# Altium PCB 175-00024_rev3, Backplane, Instrument Crate.PcbDoc (part 4 of 4)
Units mil, origin at the board's own origin, x right, y up, seen from the top; angles counter-clockwise.
Board outline 8400 x 10183.07 mil, 8 copper layers (Top Layer (*.GTL), Mid-Layer 1 (*.G1), +3.3V (*.GP1), +24V (*.GP2), RTN (*.GP3), +12V (*.GP4), Signal GND (*.GP5), Bottom Layer (*.GBL)); 240 components, 169 nets, 1580 pads, 490 vias.
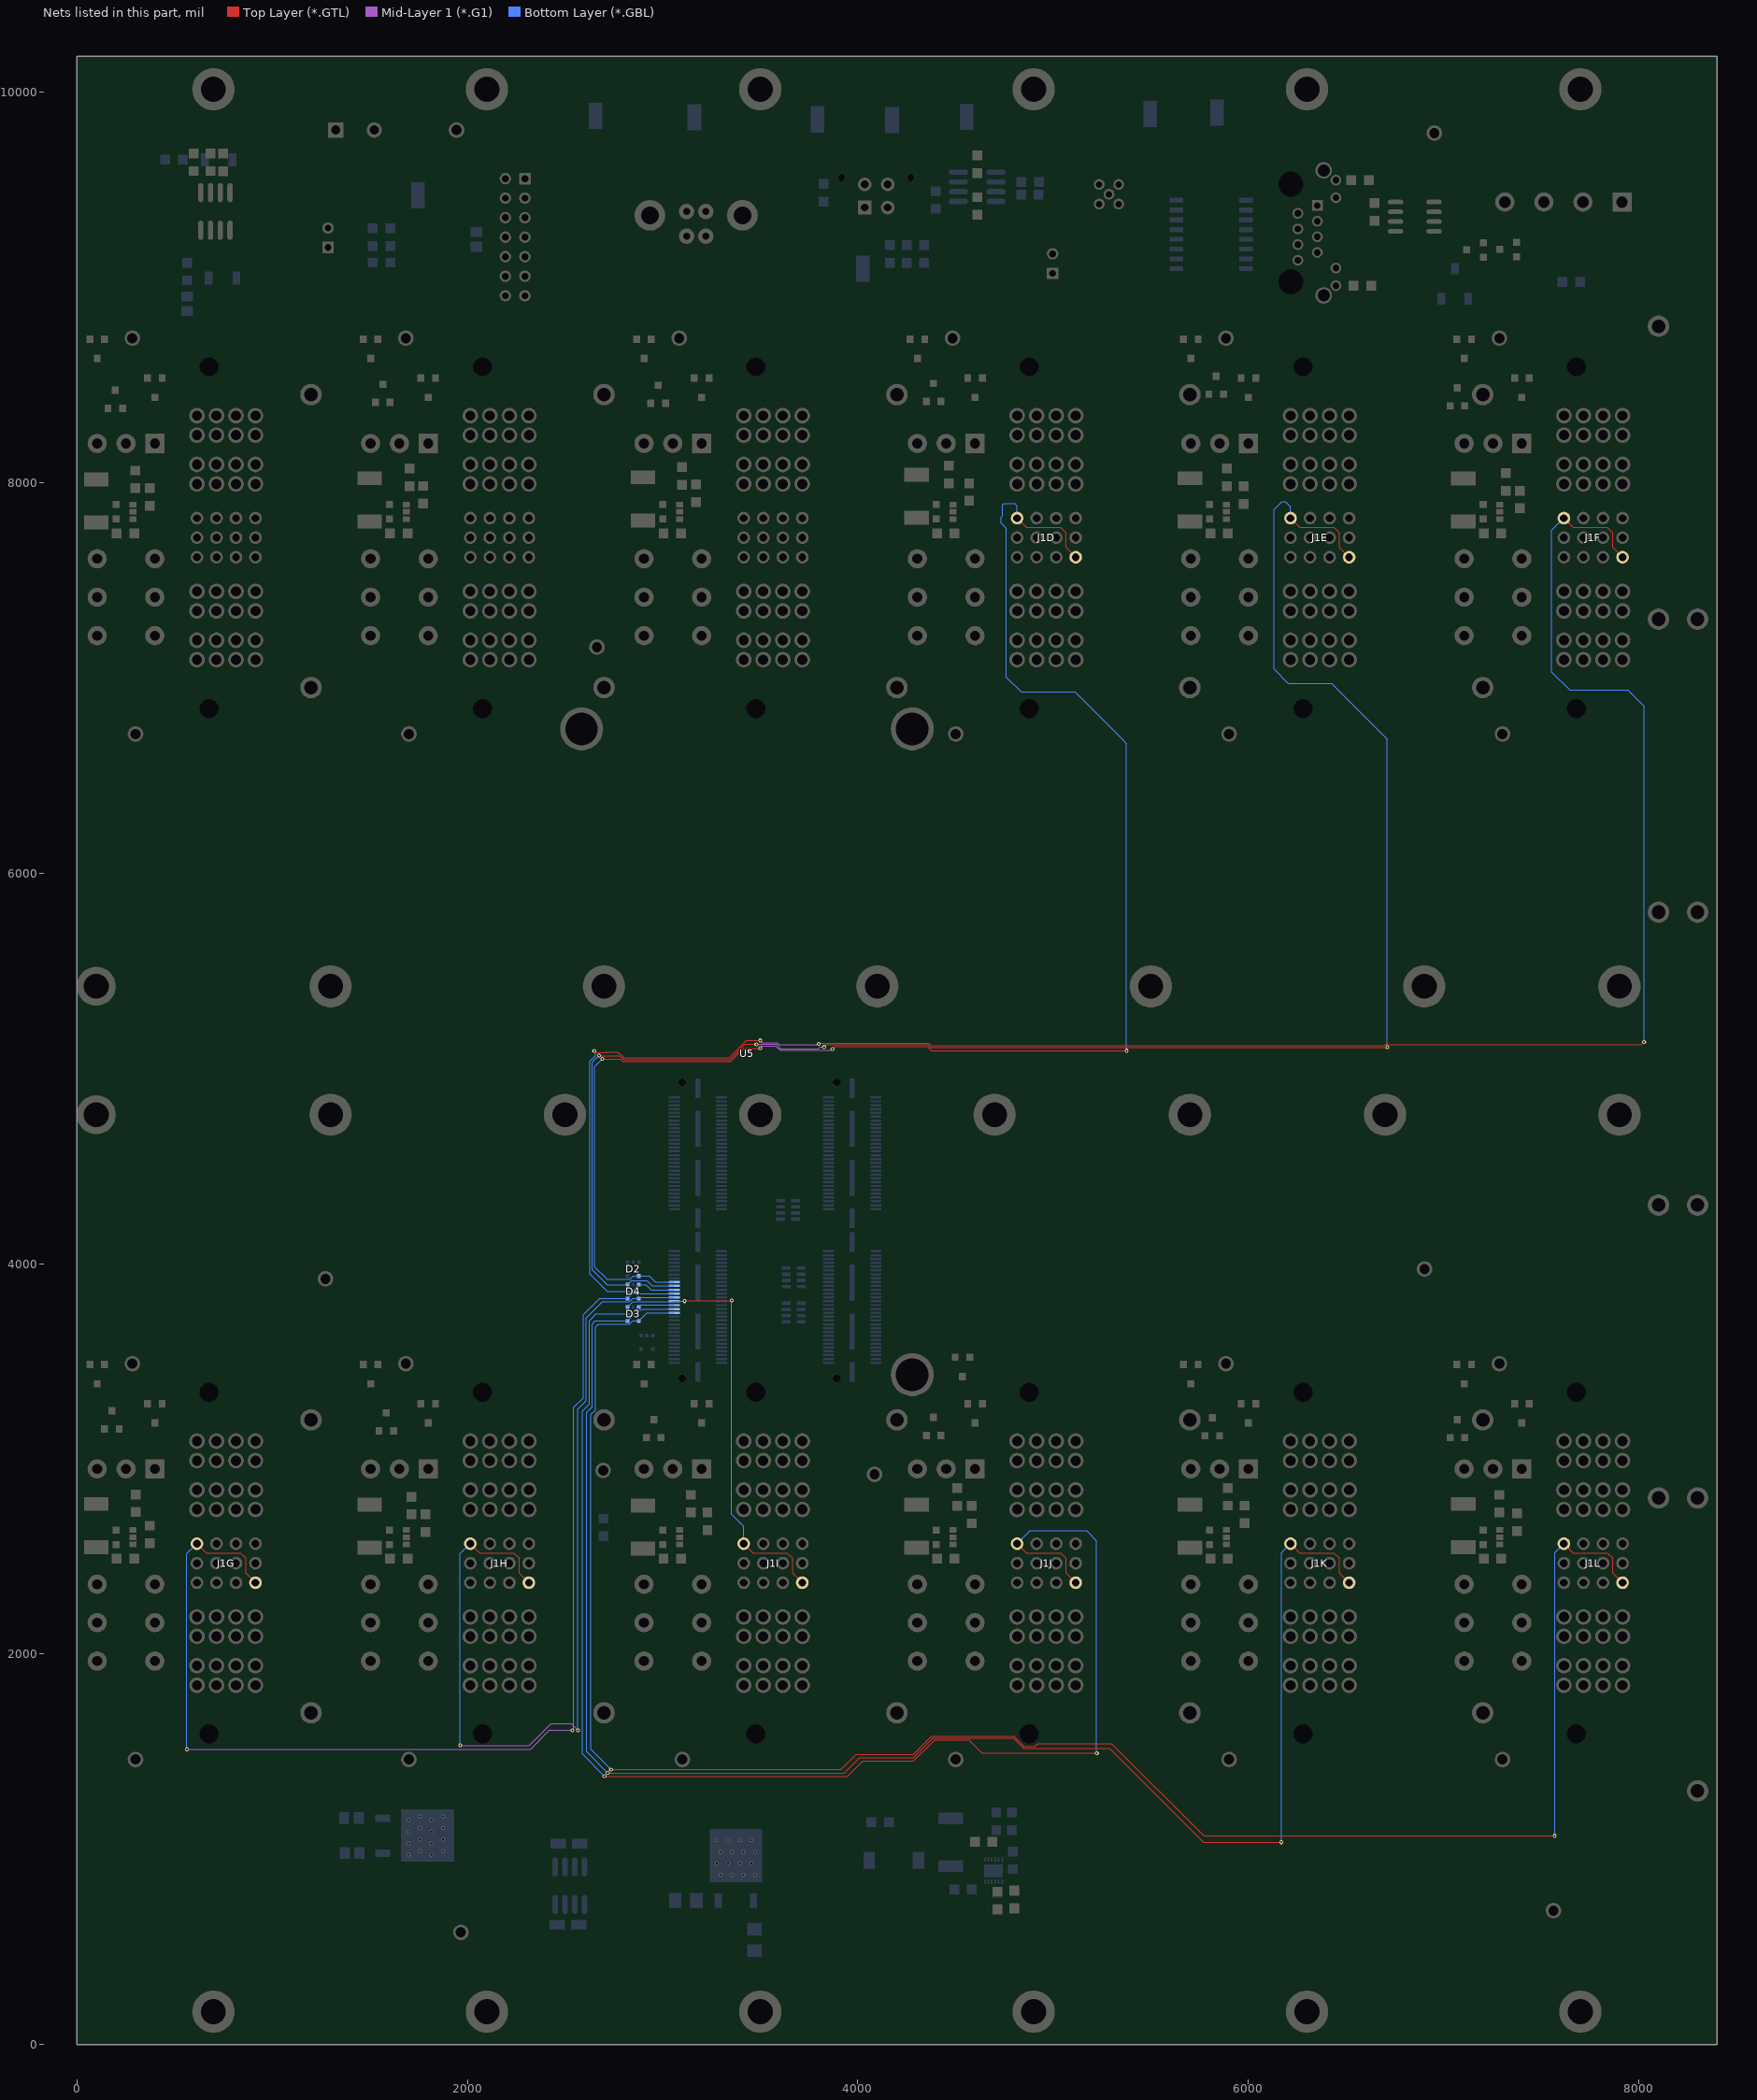
[diagram p10: the nets of this part, all layers, seen from the top]

## Via types
v1: diameter 20, hole 10, Top Layer (*.GTL) to Bottom Layer (*.GBL), 422 vias
v2: diameter 24, hole 10, Top Layer (*.GTL) to Bottom Layer (*.GBL), 28 vias
v3: diameter 50, hole 28, Top Layer (*.GTL) to Bottom Layer (*.GBL), 26 vias
v4: diameter 32, hole 20, Top Layer (*.GTL) to Bottom Layer (*.GBL), 10 vias
v5: diameter 25.98, hole 12.99, Top Layer (*.GTL) to Bottom Layer (*.GBL), tented top, 2 vias
v6: diameter 50, hole 25, Top Layer (*.GTL) to Bottom Layer (*.GBL), 2 vias

## Nets (pads, with @x,y where several pads share a name; then routed paths per layer and width w, separated by ;. In a path a pad name is that pad's centre, name@x,y a point inside that pad or via, vN(x,y) a via of type N, cw(c..) or ccw(c..) an arc to the next point about the centre after c; other vN are vias at no path point) (continued)
~CS_SLOT4: D2.4 J1D.4 J1D.9 U5.A77 | length 8077
  Top Layer (*.GTL) w5: v1(2691.09,5047.99) 2743.91,5047.99 2744,5048.08 2784,5048.08 2796.27,5035.81 3349.18,5035.81 3416.46,5103.08 v1(3500,5103.08) ; v1(3870,5099.08) 3882.5,5111.58 4355.5,5111.58 4377,5090.08 v1(5376,5090.08) ; J1D.9@4815.51,7817.16 4862.83,7769.83 5038,7769.83 5066,7741.83 5066,7666.83 J1D.4@5115.51,7617.32
  Mid-Layer 1 (*.G1) w5: v1(3500,5103.08) 3510.8,5113.88 3579,5113.88 3600.8,5092.08 3863,5092.08 v1(3870,5099.08)
  Bottom Layer (*.GBL) w5: v1(2691.09,5047.99) 2653,5009.9 2653,3982.76 2711.03,3924.73 2711.66,3924.73 2716,3920.39 2835.06,3920.39 2851.41,3936.73 D2.4@2879.06,3936.73 2930.87,3936.73 2962.05,3905.55 U5.A77@3059.12,3905.55 ; J1D.9@4815.51,7817.32 4815.51,7879.08 4802.51,7892.08 4748,7892.08 4740,7884.08 4740,7827.08 4735,7822.08 4735,7791.08 4761,7765.08 4761,7002.08 4836,6927.08 5112.14,6927.08 5356.07,6683.15 5376,6663.22 v1(5376,5090.08)
~CS_SLOT5: D4.1 J1E.4 J1E.9 U5.A79 | length 9436.6
  Top Layer (*.GTL) w5: v1(2674.12,5064.96) 2726.94,5064.96 2727.03,5065.05 2776.93,5065.05 2784.9,5057.08 2787.73,5057.08 2800,5044.81 3345.46,5044.81 3423.53,5122.88 v1(3480.2,5122.88) ; v1(3827,5109.08) 3838.5,5120.58 4359.23,5120.58 4371.73,5108.08 v1(6711,5108.08) ; J1E.9@6215.51,7817.16 6262.83,7769.83 6438,7769.83 6466,7741.83 6466,7666.83 J1E.4@6515.51,7617.32
  Mid-Layer 1 (*.G1) w5: v1(3480.2,5122.88) 3582.73,5122.88 3604.53,5101.08 3799,5101.08 3807,5109.08 v1(3827,5109.08)
  Bottom Layer (*.GBL) w5: 2638,4304.08 2641,4307.08 ; v1(2674.12,5064.96) 2641,5031.84 2641,4307.08 ; U5.A79@3059.12,3885.87 2946.73,3885.87 2920,3912.6 2840,3912.6 D4.1@2820,3892.6 2716,3892.6 2641,3967.6 2641,4307.08 ; J1E.9@6194,7838.83 J1E.9@6215.51,7817.32 6215.51,7876.08 6188.51,7903.08 6172,7903.08 6131,7862.08 6131,7045.08 6204,6972.08 6425.97,6972.08 6696.49,6701.56 6711,6687.05 v1(6711,5108.08)
~CS_SLOT6: D4.3 J1F.4 J1F.9 U5.A81 | length 10609.6
  Top Layer (*.GTL) w5: v1(2650,5089.08) 2657.15,5081.93 2709.97,5081.93 2710.06,5082.02 2769.86,5082.02 2777.83,5074.05 2780.66,5074.05 2788.63,5066.08 2791.46,5066.08 2803.73,5053.81 3341.73,5053.81 3430.6,5142.68 v1(3500,5142.68) ; v1(3799.17,5124.58) 3804.17,5129.58 4362.96,5129.58 4375.46,5117.08 6696.67,5117.08 6704.17,5124.58 6717.83,5124.58 6721.33,5121.08 8013.02,5121.08 v1(8026,5134.08) ; J1F.9@7615.51,7817.16 7662.83,7769.83 7838,7769.83 7866,7741.83 7866,7666.83 J1F.4@7915.51,7617.32
  Mid-Layer 1 (*.G1) w5: v1(3500,5142.68) 3510.8,5131.88 3586.46,5131.88 3596.25,5122.08 3796.33,5122.08 3799.17,5124.91 v1(3799.17,5124.58)
  Bottom Layer (*.GBL) w5: v1(2650,5089.08) 2657.15,5081.93 2657.15,5064.96 2629,5036.81 2629,3946.1 2716,3859.1 2842.94,3859.1 2876.44,3892.6 D4.3@2879.06,3892.6 2915,3892.6 2941.42,3866.18 U5.A81@3059.12,3866.18 ; J1F.9@7615.51,7817.32 7553,7754.81 7553,7029.08 7645,6937.08 7943,6937.08 8026,6854.08 v1(8026,5134.08)
~CS_SLOT7: D4.5 J1G.4 J1G.9 U5.A83 | length 6176.8
  Top Layer (*.GTL) w5: J1G.9@615.5,2565.98 662.82,2518.65 837.99,2518.65 865.99,2490.65 865.99,2415.65 J1G.4@915.5,2366.14
  Mid-Layer 1 (*.G1) w5: v1(565,1513.08) 2324,1513.08 2421,1610.08 v1(2539,1610.08)
  Bottom Layer (*.GBL) w5: v1(565,1513.08) 564,1514.08 564,2514.64 J1G.9@615.5,2566.14 ; v1(2539,1610.08) 2545,1616.08 2545,1726.08 2545,3264.53 2593.77,3313.3 2593.77,3738.3 2677.2,3821.73 D4.5@2820,3821.73 2844.76,3846.5 U5.A83@3059.12,3846.5
~CS_SLOT8: D4.4 J1H.4 J1H.9 U5.A85 | length 4768.5
  Top Layer (*.GTL) w5: J1H.9@2015.5,2565.98 2062.82,2518.65 2237.99,2518.65 2265.99,2490.65 2265.99,2415.65 J1H.4@2315.5,2366.14
  Mid-Layer 1 (*.G1) w5: v1(1964,1533.08) 2316,1533.08 2428.5,1645.58 2531.5,1645.58 v1(2567,1610.08)
  Bottom Layer (*.GBL) w5: v1(1964,1533.08) 1964,2514.64 J1H.9@2015.5,2566.14 ; v1(2567,1610.08) 2567,1726.08 2567,3255.42 2609.33,3297.75 2609.33,3722.75 2691.97,3805.39 2832.53,3805.39 2848.88,3821.73 D4.4@2879.06,3821.73 2884.13,3826.81 U5.A85@3059.12,3826.81
~CS_SLOT9: D3.1 J1I.4 J1I.9 U5.A87 | length 2246.6
  Top Layer (*.GTL) w5: v1(3112,3808.08) 3115,3811.08 v1(3354,3811.08) ; J1I.9@3415.5,2565.98 3462.82,2518.65 3637.99,2518.65 3665.99,2490.65 3665.99,2415.65 J1I.4@3715.5,2366.14
  Bottom Layer (*.GBL) w5: D3.1@2820,3777.6 2847.79,3805.39 3057.39,3805.39 U5.A87@3059.12,3807.13 3060.07,3808.08 v1(3112,3808.08) ; v1(3354,3811.08) 3352,3809.08 3352,2716.91 3415.5,2653.41 J1I.9@3415.5,2566.14
~CS_SLOT10: D3.3 J1J.4 J1J.9 U5.A89 | length 7460.4
  Top Layer (*.GTL) w5: v1(2702.06,1375.14) 3946.94,1375.14 4024.94,1453.14 4285,1453.14 4392.94,1561.08 4568.46,1561.08 4636.73,1492.81 v1@5224,1492.81 ; J1J.9@4815.5,2565.98 4862.82,2518.65 5037.99,2518.65 5065.99,2490.65 5065.99,2415.65 J1J.4@5115.5,2366.14
  Bottom Layer (*.GBL) w5: v1(2702.06,1375.14) 2589,1488.2 2589,3246.3 2624.89,3282.19 2624.89,3707.19 2659.79,3742.1 2840.94,3742.1 2876.44,3777.6 D3.3@2879.06,3777.6 2888.9,3787.44 U5.A89@3059.12,3787.44 ; J1J.9@4815.5,2566.14 4882.44,2633.08 5171,2633.08 5223,2581.08 5223,1494.08 v1(5224,1493.08)
~CS_SLOT11: D3.5 J1K.4 J1K.9 U5.A91 | length 8526.7
  Top Layer (*.GTL) w5: v1(2719.03,1392.11) 3929.97,1392.11 4007.97,1470.11 4285,1470.11 4384.97,1570.08 4795.62,1570.08 4848.06,1517.64 4908.94,1517.64 4909.11,1517.81 5289.34,1517.81 5771.07,1036.08 v1@6169,1036.08 ; J1K.9@6215.5,2565.98 6262.82,2518.65 6437.99,2518.65 6465.99,2490.65 6465.99,2415.65 J1K.4@6515.5,2366.14
  Bottom Layer (*.GBL) w5: v1(2719.03,1392.11) 2611,1500.14 2611,3237.19 2640.44,3266.64 2640.44,3691.64 2655.54,3706.73 D3.5@2820,3706.73 2874.52,3761.26 2891.59,3761.26 2898.09,3767.76 U5.A91@3059.12,3767.76 ; v1(6169,1037.08) 6169,2519.64 J1K.9@6215.5,2566.14
~CS_SLOT12: D3.4 J1L.4 J1L.9 U5.A93 | length 9821.8
  Top Layer (*.GTL) w5: v1(2736,1409.08) 3913,1409.08 3991,1487.08 4285,1487.08 4377,1579.08 4799.35,1579.08 4851.78,1526.64 4905.22,1526.64 4921.38,1542.81 5299.69,1542.81 5771.42,1071.08 v1@7569,1071.08 ; J1L.9@7615.5,2565.98 7662.82,2518.65 7837.99,2518.65 7865.99,2490.65 7865.99,2415.65 J1L.4@7915.5,2366.14
  Bottom Layer (*.GBL) w5: v1(2736,1409.08) 2633,1512.08 2633,3228.08 2656,3251.08 2656,3676.08 2670.31,3690.39 2832.53,3690.39 2848.88,3706.73 D3.4@2879.06,3706.73 2920.39,3748.07 U5.A93@3059.12,3748.07 ; v1(7568,1070.08) 7569,1071.08 7569,2519.64 J1L.9@7615.5,2566.14
pads on no net: D5.5 J1A.0 J1A.7 J1A.8 J1B.0 J1B.7 J1B.8 J1C.0 J1C.7 J1C.8 J1D.0 J1D.7 J1D.8 J1E.0 J1E.7 J1E.8 J1F.0 J1F.7 J1F.8 J1G.0 J1G.7 J1G.8 J1H.0 J1H.7 J1H.8 J1I.0 J1I.7 J1I.8 J1J.0 J1J.7 J1J.8 J1K.0 J1K.7 J1K.8 J1L.0 J1L.7 J1L.8 J2.3 J3.4 J3.5 J3.7 J3.8 J3.MH1 J3.MH2 J5.0 K1A.12 K1B.12 K1C.12 K1D.12 K1E.12 K1F.12 K1G.12 K1H.12 K1I.12 K1J.12 K1K.12 K1L.12 L1.2 L1.4 L1.5 L1.7 L1.12 L1.13 S3.3 U1.5 U5.0 U5.1 U5.A4 U5.A6 U5.A8 U5.A10 U5.A12 U5.A14 U5.A16 U5.A18 U5.A20 U5.A22 U5.A24 U5.A26 U5.A28 U5.A30 U5.A32 U5.A34 U5.A36 U5.A38 U5.A40 U5.A41 U5.A42 U5.A43 U5.A44 U5.A46 U5.A48 U5.A50 U5.A52 U5.A54 U5.A56 U5.A57 U5.A58 U5.A59 U5.A60 U5.A61 U5.A62 U5.A63 U5.A64 U5.A65 U5.A67 U5.A69 U5.A72 U5.A74 U5.A76 U5.A78 U5.A80 U5.A82 U5.A84 U5.A86 U5.A88 U5.A90 U5.A92 U5.A94 U5.A96 U5.A98 U5.A99 U5.A100 U5.A101 U5.A102 U5.A104 U5.A106 U5.A107 U5.A108 U5.A110 U5.A112 U5.A113 U5.A114 U5.A115 U5.A116 U5.A117 U5.A118 U5.A119 U5.A120 U5.B1 U5.B3 U5.B5 U5.B7 U5.B9 U5.B11 U5.B13 U5.B15 U5.B17 U5.B19 U5.B21 U5.B23 U5.B25 U5.B27 U5.B29 U5.B31 U5.B33 U5.B35 U5.B37 U5.B39 U5.B41 U5.B43 U5.B45 U5.B69 U5.B90 U5.B92 U5.B94 U5.B95 U5.B96 U5.B97 U5.B98 U5.B99 U5.B100 U5.B101 U5.B102 U5.B103 U5.B104 U5.B105 U5.B106 U5.B107 U5.B108 U5.B109 U5.B110 U5.B111 U5.B112 U5.B113 U5.B114 U5.B115 U5.B116 U5.B117 U5.B118 U5.B119 U5.B120 U6.1 U6.5 U6.8 U21.3 U21.11 U22.1 U22.6 U22.7
copper on no net: | length 426.6
  Bottom Layer (*.GBL) w10: 6968.9,467 ccw(c6901,467) 6968.9,467

## Polygon pours and split planes (outlines as drawn)
NetD1_1 on Bottom Layer (*.GBL) "Bottom Layer-AGND" (solid, pour order 19): 4653.8,934.34 4622.37,934.34 4622.37,844.34 4389.8,844.34 4389.8,979.34 4653.8,979.34 4653.8,934.34
NetC11_1 on Bottom Layer (*.GBL) "Top Layer (*.GTL)-No Net" (solid, pour order 17): 4653.8,1217.32 4674.8,1217.32 4674.8,932.32 4672.78,934.34 4653.8,934.34 4653.8,1217.32
+3.3V on Bottom Layer (*.GBL) "Top Layer (*.GTL)-No Net" (solid, pour order 18): 4274.8,737.32 4269.8,742.32 4269.8,1237.32 4009.8,1237.32 4009.8,737.32 4269.8,737.32
NetC11_1 on Bottom Layer (*.GBL) "Top Layer (*.GTL)-No Net" (solid, pour order 16): 4529.12,747.32 4529.12,851.58 4399.45,851.58 4399.45,987.11 4643.83,987.11 4648.81,981.9 4653.8,987.11 4653.8,1237.32 4279.75,1237.32 4259.8,1237.32 4259.8,747.32 4529.12,747.32
+3.3V on Bottom Layer (*.GBL) "Bottom Layer-AGND" (solid, pour order 22): 4009.8,753.52 4009.8,704.34 4673.82,704.34 4673.82,839.1 4675,840.08 4673.82,839.1 4662.05,839.1 4662.05,753.52 4009.8,753.52
GND on Bottom Layer (*.GBL) "Bottom Layer-AGND" (solid, pour order 21): 4727,856.08 4727,934.34 4827,934.34 4827,856.08 4727,856.08
+24V on Bottom Layer (*.GBL) "Bottom Layer-AGND" (solid, pour order 20): 4733.8,934.34 4828.8,934.34 4828.8,1049.34 4733.8,1049.34 4733.8,934.34
+24V on Bottom Layer (*.GBL) "Top Layer (*.GTL)-No Net 1" (solid, pour order 9): 3590,790 3380,790 3380,540 3590,540 3590,790
+12V on Bottom Layer (*.GBL) "Top Layer (*.GTL)-No Net 1" (solid, pour order 11): 3330,790 3120,790 3120,540 3330,540 3330,790
+3.3V on +3.3V (*.GP1) (split plane): 8379.9,20.1 20.1,20.1 20.1,10162.97 8379.9,10162.97
NetK1F_11 on +24V (*.GP2) (split plane): 7499.9,7525 7499.9,7330.1 7030.1,7330.1 7030.1,7814.9 7499.9,7814.9
NetK1E_11 on +24V (*.GP2) (split plane): 6099.9,7525 6099.9,7330.1 5630.1,7330.1 5630.1,7814.9 6099.9,7814.9
NetJ1F_13 on +24V (*.GP2) (split plane): 8064.9,7045.1 7030.1,7045.1 7030.1,7319.9 7505,7319.9 7506.95,7320.29 7508.6,7321.4 7509.71,7323.05 7510.1,7325 7510.1,7519.9 8064.9,7519.9
NetJ1E_13 on +24V (*.GP2) (split plane): 6664.9,7045.1 5630.1,7045.1 5630.1,7319.9 6105,7319.9 6106.95,7320.29 6108.6,7321.4 6109.71,7323.05 6110.1,7325 6110.1,7519.9 6664.9,7519.9
NetJ1D_13 on +24V (*.GP2) (split plane): 5264.9,7045.1 4230.1,7045.1 4230.1,7319.9 4705,7319.9 4706.95,7320.29 4708.6,7321.4 4709.71,7323.05 4710.1,7325 4710.1,7519.9 5264.9,7519.9
NetK1D_11 on +24V (*.GP2) (split plane): 4699.9,7525 4699.9,7330.1 4230.1,7330.1 4230.1,7814.9 4699.9,7814.9
NetJ1C_13 on +24V (*.GP2) (split plane): 3864.9,7045.1 2830.1,7045.1 2830.1,7319.9 3305,7319.9 3306.95,7320.29 3308.6,7321.4 3309.71,7323.05 3310.1,7325 3310.1,7519.9 3864.9,7519.9
NetJ1L_13 on +24V (*.GP2) (split plane): 8064.89,1793.92 7030.09,1793.92 7030.09,2068.72 7504.99,2068.72 7506.94,2069.11 7508.59,2070.21 7509.7,2071.87 7510.09,2073.82 7510.09,2268.72 8064.89,2268.72
NetK1L_11 on +24V (*.GP2) (split plane): 7499.89,2273.82 7499.89,2078.92 7030.09,2078.92 7030.09,2563.72 7499.89,2563.72
NetJ1K_13 on +24V (*.GP2) (split plane): 6664.89,1793.92 5630.09,1793.92 5630.09,2068.72 6104.99,2068.72 6106.94,2069.11 6108.59,2070.21 6109.7,2071.87 6110.09,2073.82 6110.09,2268.72 6664.89,2268.72
NetK1K_11 on +24V (*.GP2) (split plane): 6099.89,2273.82 6099.89,2078.92 5630.09,2078.92 5630.09,2563.72 6099.89,2563.72
NetK1J_11 on +24V (*.GP2) (split plane): 4699.89,2273.82 4699.89,2078.92 4230.09,2078.92 4230.09,2563.72 4699.89,2563.72
NetJ1J_13 on +24V (*.GP2) (split plane): 5264.89,1793.92 4230.09,1793.92 4230.09,2068.72 4704.99,2068.72 4706.94,2069.11 4708.59,2070.21 4709.7,2071.87 4710.09,2073.82 4710.09,2268.72 5264.89,2268.72
NetK1C_11 on +24V (*.GP2) (split plane): 3299.9,7525 3299.9,7330.1 2830.1,7330.1 2830.1,7814.9 3299.9,7814.9
NetJ1B_13 on +24V (*.GP2) (split plane): 2464.9,7045.1 1430.1,7045.1 1430.1,7319.9 1905,7319.9 1906.95,7320.29 1908.6,7321.4 1909.71,7323.05 1910.1,7325 1910.1,7519.9 2464.9,7519.9
NetK1I_11 on +24V (*.GP2) (split plane): 3299.89,2273.82 3299.89,2078.92 2830.09,2078.92 2830.09,2563.72 3299.89,2563.72
NetK1B_11 on +24V (*.GP2) (split plane): 1899.9,7525 1899.9,7330.1 1430.1,7330.1 1430.1,7814.9 1899.9,7814.9
NetK1A_11 on +24V (*.GP2) (split plane): 499.9,7525 499.9,7330.1 30.1,7330.1 30.1,7814.9 499.9,7814.9
NetJ1A_13 on +24V (*.GP2) (split plane): 1064.9,7045.1 30.1,7045.1 30.1,7319.9 505,7319.9 506.95,7320.29 508.6,7321.4 509.71,7323.05 510.1,7325 510.1,7519.9 1064.9,7519.9
NetJ1I_13 on +24V (*.GP2) (split plane): 3864.89,1793.92 2830.09,1793.92 2830.09,2068.72 3304.99,2068.72 3306.94,2069.11 3308.59,2070.21 3309.7,2071.87 3310.09,2073.82 3310.09,2268.72 3864.89,2268.72
+24V on +24V (*.GP2) (split plane): 8379.9,20.1 20.1,20.1 20.1,1787.78 20.28,1786.87 21.38,1785.21 23.04,1784.11 24.99,1783.72 1069.99,1783.72 1071.94,1784.11 1073.59,1785.21 1074.7,1786.87 1075.09,1788.82 1075.09,2273.82 1074.7,2275.77 1073.59,2277.42 1071.94,2278.53 1069.99,2278.92 510.09,2278.92 510.09,2568.82 509.7,2570.77 508.59,2572.42 506.94,2573.53 504.99,2573.92 24.99,2573.92 23.04,2573.53 21.38,2572.42 20.28,2570.77 20.1,2569.86 20.1,7039.02 20.29,7038.05 21.4,7036.4 23.05,7035.29 25,7034.9 1070,7034.9 1071.95,7035.29 1073.6,7036.4 1074.71,7038.05 1075.1,7040 1075.1,7525 1074.71,7526.95 1073.6,7528.6 1071.95,7529.71 1070,7530.1 510.1,7530.1 510.1,7820 509.71,7821.95 508.6,7823.6 506.95,7824.71 505,7825.1 25,7825.1 23.05,7824.71 21.4,7823.6 20.29,7821.95 20.1,7820.98 20.1,10162.97 8379.9,10162.97
NetJ1H_13 on +24V (*.GP2) (split plane): 2464.89,1793.92 1430.09,1793.92 1430.09,2068.72 1904.99,2068.72 1906.94,2069.11 1908.59,2070.21 1909.7,2071.87 1910.09,2073.82 1910.09,2268.72 2464.89,2268.72
NetK1H_11 on +24V (*.GP2) (split plane): 1899.89,2273.82 1899.89,2078.92 1430.09,2078.92 1430.09,2563.72 1899.89,2563.72
NetK1G_11 on +24V (*.GP2) (split plane): 499.89,2273.82 499.89,2078.92 30.09,2078.92 30.09,2563.72 499.89,2563.72
NetJ1G_13 on +24V (*.GP2) (split plane): 1064.89,1793.92 30.09,1793.92 30.09,2068.72 504.99,2068.72 506.94,2069.11 508.59,2070.21 509.7,2071.87 510.09,2073.82 510.09,2268.72 1064.89,2268.72
RTN on RTN (*.GP3) (split plane): 8379.9,20.1 20.1,20.1 20.1,10162.97 8379.9,10162.97
+12V on +12V (*.GP4) (split plane): 8379.9,20.1 20.1,20.1 20.1,10162.97 8379.9,10162.97
GND on Signal GND (*.GP5) (split plane): 8379.9,20.1 20.1,20.1 20.1,10162.97 8379.9,10162.97

## Other copper
Top Layer (*.GTL):
  text "*.GTL - TOP LAYER GERBER DATA" at 2775,-1046 h80
Mid-Layer 1 (*.G1):
  text "*.G1 - MID LAYER 1 GERBER DATA" at 2779,-1046 h80
Bottom Layer (*.GBL):
  text "PCB, 175-00024, REV 3" at 6911,730 h60
  text "BACKPLANE, INSTRUMENT CRATE" at 6928,597 h60
  text "LAS CUMBRES OBSERVATORY" at 6343,452 h60
  text "c  2012" at 6923,447 h60
  text "*.GBL - BOTTOM LAYER GERBER DATA" at 2775,-1046 h80
+24V (*.GP2) (plane layer: these items are gaps in the copper):
  lines w10: 24.99,2073.82 24.99,2568.82 504.99,2568.82 504.99,2273.82 ; 24.99,2073.82 504.99,2073.82 504.99,2273.82 ; 24.99,2073.82 24.99,1788.82 1069.99,1788.82 1069.99,2273.82 504.99,2273.82 ; 25,7325 25,7040 1070,7040 1070,7525 505,7525 ; 25,7325 505,7325 505,7525 ; 25,7325 25,7820 505,7820 505,7525 ; 1424.99,2073.82 1424.99,2568.82 1904.99,2568.82 1904.99,2273.82 ; 1424.99,2073.82 1904.99,2073.82 1904.99,2273.82 ; 1424.99,2073.82 1424.99,1788.82 2469.99,1788.82 2469.99,2273.82 1904.99,2273.82 ; 1425,7325 1425,7820 1905,7820 1905,7525 ; 1425,7325 1905,7325 1905,7525 ; 1425,7325 1425,7040 2470,7040 2470,7525 1905,7525 ; 2824.99,2073.82 2824.99,2568.82 3304.99,2568.82 3304.99,2273.82 ; 2824.99,2073.82 3304.99,2073.82 3304.99,2273.82 ; 2824.99,2073.82 2824.99,1788.82 3869.99,1788.82 3869.99,2273.82 3304.99,2273.82 ; 2825,7325 2825,7820 3305,7820 3305,7525 ; 2825,7325 3305,7325 3305,7525 ; 2825,7325 2825,7040 3870,7040 3870,7525 3305,7525 ; 4224.99,2073.82 4224.99,2568.82 4704.99,2568.82 4704.99,2273.82 ; 4224.99,2073.82 4704.99,2073.82 4704.99,2273.82 ; 4224.99,2073.82 4224.99,1788.82 5269.99,1788.82 5269.99,2273.82 4704.99,2273.82 ; 4225,7325 4225,7820 4705,7820 4705,7525 ; 4225,7325 4705,7325 4705,7525 ; 4225,7325 4225,7040 5270,7040 5270,7525 4705,7525 ; 5624.99,2073.82 5624.99,2568.82 6104.99,2568.82 6104.99,2273.82 ; 5624.99,2073.82 6104.99,2073.82 6104.99,2273.82 ; 5624.99,2073.82 5624.99,1788.82 6669.99,1788.82 6669.99,2273.82 6104.99,2273.82 ; 5625,7325 5625,7820 6105,7820 6105,7525 ; 5625,7325 6105,7325 6105,7525 ; 5625,7325 5625,7040 6670,7040 6670,7525 6105,7525 ; 7024.99,2073.82 7024.99,2568.82 7504.99,2568.82 7504.99,2273.82 ; 7024.99,2073.82 7504.99,2073.82 7504.99,2273.82 ; 7024.99,2073.82 7024.99,1788.82 8069.99,1788.82 8069.99,2273.82 7504.99,2273.82 ; 7025,7325 7025,7820 7505,7820 7505,7525 ; 7025,7325 7505,7325 7505,7525 ; 7025,7325 7025,7040 8070,7040 8070,7525 7505,7525
  text "*.GP2 - INTERNAL PLANE LAYER 1 GERBER DATA" at 2794,-1046 h80
RTN (*.GP3) (plane layer: these items are gaps in the copper):
  text "*.GP3 - INTERNAL PLANE LAYER 2 GERBER DATA" at 2775,-1046 h80
+12V (*.GP4) (plane layer: these items are gaps in the copper):
  text "*.GP4 - INTERNAL PLANE LAYER 4 GERBER DATA" at 2775,-1046 h80
Signal GND (*.GP5) (plane layer: these items are gaps in the copper):
  text "*.GP5- INTERNAL PLANE LAYER 5 GERBER DATA" at 2775,-1046 h80
+3.3V (*.GP1) (plane layer: these items are gaps in the copper):
  text "*.GP1- INTERNAL PLANE LAYER 3 GERBER DATA" at 2803,-1046 h80

## Silkscreen, mask and mechanical layers (free items; w line width, h text height)
Top Overlay:
  rectangle: 6640,671 7024,993
  text "SCH, 780-00029 Rev:" at 5440,833 h60
  text "BACKPLANE, INSTRUMENT CRATE" at 5428,555 h60
  text "*.GTO - TOP OVERLAY GERBER DATA" at 2775,-1046 h80
Bottom Overlay:
  text "SCL" at 5905,10005 h60
  text "+3.3V" at 2804,9993.08 h60
  text "SDA" at 5571,9993 h60
  text "+5V" at 3251,9988.08 h60
  text "-12V" at 3920,9978.08 h60
  text "+12V" at 4304,9978.08 h60
  text "+24V" at 4688,9978.08 h60
  text "GND" at 7026,9878.08 h60
  text "GND" at 1905,9875 h60
  text "ALL ON" at 1045,9759.08 h120
  text "+24V" at 7930,9731 h60
  text "GND" at 7481,9725 h60
  text "JTAG" at 2077,9521 h60
  text "OUTLET" at 1460,9393 h60
  text "INLET" at 5118,9255 h60
  text "ALL OFF" at 1013,9191.08 h120
  text "PGM" at 7351,8984 h60
  text "GND" at 6985,4075.08 h60
  text "GND" at 1351,4006 h60
  text "GND" at 7647,768 h60
  text "GND" at 2038,633 h60
  text "*GBO - BOTTOM OVERLAY GERBER DATA" at 2775,-1046 h80
Top Paste:
  text "*.GTP - TOP-SIDE SOLDER PASTE MASK" at 2774.99,-1045.99 h80
Bottom Paste:
  text "*.GBP - BOTTOM-SIDE SOLDER PASTE MASK" at 2774.99,-1045.99 h80
Top Solder:
  text "*.GTS - TOP SOLDER MASK GERBER DATA" at 2775,-1046 h80
Bottom Solder:
  rectangle: 4936,366 6987,826
  text "*.GBS - BOTTOM SOLDER MASK GERBER DATA" at 2775,-1046 h80
Mechanical 1:
  lines w25: 315.24,3632.36 ccw(c415.24,3632.36) 415.24,3532.36 964.76,3532.36 ; 410.24,5643.08 cw(c410.24,5743.08) 310.24,5743.08 310.24,6552.11 ; 411.21,5642.6 960.24,5642.6 ccw(c960.24,5742.6) 1060.24,5742.6 1060.24,6552.6 ; 414.76,3532.36 cw(c414.76,3632.36) 314.76,3632.36 314.76,4441.39 cw(c414.76,4441.39) 414.76,4541.39 ; 415.24,4541.88 964.76,4541.88 cw(c964.76,4441.88) 1064.76,4441.88 1064.76,3631.88 cw(c964.76,3631.88) 964.76,3531.88 415.72,3531.88 ; 965.24,3532.84 ccw(c965.24,3632.84) 1065.24,3632.84 ; 1695.24,3622.36 ccw(c1795.24,3622.36) 1795.24,3522.36 2344.76,3522.36 ; 1794.76,3522.36 cw(c1794.76,3622.36) 1694.76,3622.36 1694.76,4431.39 cw(c1794.76,4431.39) 1794.76,4531.39 ; 1795.24,4531.88 2344.76,4531.88 cw(c2344.76,4431.88) 2444.76,4431.88 2444.76,3621.88 cw(c2344.76,3621.88) 2344.76,3521.88 1795.72,3521.88 ; 1810.24,5643.08 cw(c1810.24,5743.08) 1710.24,5743.08 1710.24,6552.11 ; 1811.21,5642.6 2360.24,5642.6 ccw(c2360.24,5742.6) 2460.24,5742.6 2460.24,6552.6 ; 2345.24,3522.84 ccw(c2345.24,3622.84) 2445.24,3622.84 ; 3234.76,5633.32 cw(c3234.76,5733.32) 3134.76,5733.32 3134.76,6542.36 ; 3235.72,5632.84 3784.76,5632.84 ccw(c3784.76,5732.84) 3884.76,5732.84 3884.76,6542.84 ; 4594.76,5643.32 cw(c4594.76,5743.32) 4494.76,5743.32 4494.76,6552.36 ; 4595.72,5642.84 5144.76,5642.84 ccw(c5144.76,5742.84) 5244.76,5742.84 5244.76,6552.84 ; 4635.24,3622.36 ccw(c4735.24,3622.36) 4735.24,3522.36 5284.76,3522.36 ; 4734.76,3522.36 cw(c4734.76,3622.36) 4634.76,3622.36 4634.76,4431.39 cw(c4734.76,4431.39) 4734.76,4531.39 ; 4735.24,4531.88 5284.76,4531.88 cw(c5284.76,4431.88) 5384.76,4431.88 5384.76,3621.88 cw(c5284.76,3621.88) 5284.76,3521.88 4735.72,3521.88 ; 5285.24,3522.84 ccw(c5285.24,3622.84) 5385.24,3622.84 ; 5955.24,4541.39 ccw(c5955.24,4441.39) 5855.24,4441.39 5855.24,3632.36 ; 5955.73,4541.88 6505.24,4541.88 cw(c6505.24,4441.88) 6605.24,4441.88 6605.24,3631.88 cw(c6505.24,3631.88) 6505.24,3531.88 5956.21,3531.88 ; 5994.76,5653.32 cw(c5994.76,5753.32) 5894.76,5753.32 5894.76,6562.36 ; 5995.72,5652.84 6544.76,5652.84 ccw(c6544.76,5752.84) 6644.76,5752.84 6644.76,6562.84 ; 6504.76,3532.36 5955.24,3532.36 ; 6505.24,3532.84 ccw(c6505.24,3632.84) 6605.24,3632.84 ; 7245.24,3642.36 ccw(c7345.24,3642.36) 7345.24,3542.36 7894.76,3542.36 ; 7334.76,5643.32 cw(c7334.76,5743.32) 7234.76,5743.32 7234.76,6552.36 ; 7335.72,5642.84 7884.76,5642.84 ccw(c7884.76,5742.84) 7984.76,5742.84 7984.76,6552.84 ; 7344.76,3542.36 cw(c7344.76,3642.36) 7244.76,3642.36 7244.76,4451.39 cw(c7344.76,4451.39) 7344.76,4551.39 ; 7345.24,4551.88 7894.76,4551.88 cw(c7894.76,4451.88) 7994.76,4451.88 7994.76,3641.88 cw(c7894.76,3641.88) 7894.76,3541.88 7345.72,3541.88 ; 7895.24,3542.84 ccw(c7895.24,3642.84) 7995.24,3642.84 ; 8400,10173.07 8400,0 0,0 0,10183.07 8400,10183.07 ; 310.24,6552.11 cw(c410.24,6552.11) 410.24,6652.11 ccw(c410.24,6552.11) 310.24,6552.11 ; 960.24,6652.6 cw(c960.24,6552.6) 1060.24,6552.6 ; 960.24,6652.6 cw(c960.24,6552.6) 1060.24,6552.6 ; 960.24,6652.6 410.73,6652.6 960.24,6652.6 ; 1710.24,6552.11 cw(c1810.24,6552.11) 1810.24,6652.11 ccw(c1810.24,6552.11) 1710.24,6552.11 ; 2360.24,6652.6 cw(c2360.24,6552.6) 2460.24,6552.6 ; 2360.24,6652.6 cw(c2360.24,6552.6) 2460.24,6552.6 ; 2360.24,6652.6 1810.73,6652.6 2360.24,6652.6 ; 3134.76,6542.36 cw(c3234.76,6542.36) 3234.76,6642.36 ccw(c3234.76,6542.36) 3134.76,6542.36 ; 3784.76,6642.84 cw(c3784.76,6542.84) 3884.76,6542.84 ; 3784.76,6642.84 cw(c3784.76,6542.84) 3884.76,6542.84 ; 3784.76,6642.84 3235.24,6642.84 3784.76,6642.84 ; 4494.76,6552.36 cw(c4594.76,6552.36) 4594.76,6652.36 ccw(c4594.76,6552.36) 4494.76,6552.36 ; 5144.76,6652.84 cw(c5144.76,6552.84) 5244.76,6552.84 ; 5144.76,6652.84 cw(c5144.76,6552.84) 5244.76,6552.84 ; 5144.76,6652.84 4595.24,6652.84 5144.76,6652.84 ; 5855.24,3632.36 ccw(c5955.24,3632.36) 5955.24,3532.36 ; 5855.24,3632.36 ccw(c5955.24,3632.36) 5955.24,3532.36 ; 5894.76,6562.36 cw(c5994.76,6562.36) 5994.76,6662.36 ccw(c5994.76,6562.36) 5894.76,6562.36 ; 6544.76,6662.84 cw(c6544.76,6562.84) 6644.76,6562.84 ; 6544.76,6662.84 cw(c6544.76,6562.84) 6644.76,6562.84 ; 6544.76,6662.84 5995.24,6662.84 6544.76,6662.84 ; 7234.76,6552.36 cw(c7334.76,6552.36) 7334.76,6652.36 ccw(c7334.76,6552.36) 7234.76,6552.36 ; 7884.76,6652.84 cw(c7884.76,6552.84) 7984.76,6552.84 ; 7884.76,6652.84 cw(c7884.76,6552.84) 7984.76,6552.84 ; 7884.76,6652.84 7335.24,6652.84 7884.76,6652.84
Mechanical 2:
  lines w10: -12282,-4979 -12282,11021 8718,11021 8718,-4979 -12282,-4979 ; 4663,-4873 ccw(c4713,-4873) 4713,-4923 5043,-4923 ccw(c5043,-4883) 5083,-4883 5083,-4713 ccw(c5043,-4713) 5043,-4673 4663,-4673 4663,-4873 ; 4663,-4583 ccw(c4713,-4583) 4713,-4633 8613,-4633 ccw(c8613,-4583) 8663,-4583 8663,-4393 ccw(c8613,-4393) 8613,-4343 4663,-4343 4663,-4583 ; 4663,-4253 ccw(c4713,-4253) 4713,-4303 6593,-4303 ccw(c6593,-4253) 6643,-4253 6643,-4103 ccw(c6593,-4103) 6593,-4053 4663,-4053 4663,-4253 ; 4663,-3973 ccw(c4703,-3973) 4703,-4013 5513,-4013 ccw(c5513,-3963) 5563,-3963 5563,-3813 ccw(c5513,-3813) 5513,-3763 4663,-3763 4663,-3973 ; 5123,-4883 ccw(c5163,-4883) 5163,-4923 7123,-4923 ccw(c7123,-4883) 7163,-4883 7163,-4713 ccw(c7123,-4713) 7123,-4673 5123,-4673 5123,-4883 ; 5603,-3963 ccw(c5653,-3963) 5653,-4013 6593,-4013 ccw(c6593,-3963) 6643,-3963 6643,-3813 ccw(c6593,-3813) 6593,-3763 5603,-3763 5603,-3963 ; 6683,-4253 ccw(c6733,-4253) 6733,-4303 8613,-4303 ccw(c8613,-4253) 8663,-4253 8663,-4103 ccw(c8613,-4103) 8613,-4053 6683,-4053 6683,-4253 ; 6683,-3963 ccw(c6733,-3963) 6733,-4013 7673,-4013 ccw(c7673,-3963) 7723,-3963 7723,-3813 ccw(c7673,-3813) 7673,-3763 6683,-3763 6683,-3963 ; 7203,-4873 ccw(c7253,-4873) 7253,-4923 7583,-4923 ccw(c7583,-4883) 7623,-4883 7623,-4713 ccw(c7583,-4713) 7583,-4673 7203,-4673 7203,-4873 ; 7663,-4883 ccw(c7703,-4883) 7703,-4923 8613,-4923 ccw(c8613,-4873) 8663,-4873 8663,-4723 ccw(c8613,-4723) 8613,-4673 7663,-4673 7663,-4883 ; 7763,-3963 ccw(c7813,-3963) 7813,-4013 8613,-4013 ccw(c8613,-3963) 8663,-3963 8663,-3813 ccw(c8613,-3813) 8613,-3763 7763,-3763 7763,-3963
  lines w17: -11750,-30.5 -6170,-30.5 ; -11750,281.7 -6170,281.7 ; -11810,-3618 ccw(c-11709,-3618) -11709,-3719 -6211,-3719 ccw(c-6211,-3618) -6110,-3618 -6110,780 ccw(c-6211,780) -6211,881 -11709,881 ccw(c-11709,780) -11810,780 -11810,-3618
  lines w20: -12261.94,-4333.12 cw(c-12212,-4408) -12212,-4318 ; -12212,-4358 ccw(c-12212,-4408) -12262,-4408 -12262,-4898 ccw(c-12212,-4898) -12212,-4948 -9012,-4948 ccw(c-9012,-4898) -8962,-4898 -8962,-4558 ccw(c-9012,-4558) -9012,-4508 ; -8937.12,-4947.94 ccw(c-9012,-4898) -8922,-4898 -8922,-4558 ; 4619.17,-4962.98 cw(c4713,-4873) 4583,-4873 4583,-3203 cw(c4713,-3203) 4713,-3073 8613,-3073 cw(c8613,-3203) 8701.66,-3107.92 ; -4752,-4799 ccw(c-4622,-4799) -4622,-4929 118,-4929 ccw(c118,-4799) 248,-4799 248,-3209 ccw(c118,-3209) 118,-3079 -4622,-3079 ccw(c-4622,-3209) -4752,-3209 -4752,-4799 ; 4623,-4873 ccw(c4713,-4873) 4713,-4963 8613,-4963 ccw(c8613,-4873) 8703,-4873 8703,-3203 ccw(c8613,-3203) 8613,-3113 4713,-3113 ccw(c4713,-3203) 4623,-3203 4623,-4873
  lines w24: -2202,-4769 -2052,-4769 ; -2202,-4519 -2052,-4519 ; -2202,-4269 -2052,-4269 ; -2202,-4019 -2052,-4019 ; -2202,-3769 -2052,-3769
  lines w30: -12782,-5479 -12782,11521 9218,11521 9218,-5479 -12782,-5479
  lines w50: 4808,-3614 6458,-3614 ; 4808,-3234 6458,-3234 ; 6458,-3614 6458,-3234 ; 6458,-3614 4798,-3614 4798,-3234 6458,-3234
  text "NOTES (UNLESS OTHERWISE SPECIFIED):" at -11962,10497 h90
  text "GENERAL" at -11862,10297 h90
  text "1)" at -11762,10096.95 h75
  text "PCB IS x-LAYER, .062\" THICK." at -11562,10096.97 h75
  text "2)" at -11762,9946.95 h75
  text "CONSTRUCTION IS SOLDER-MASK-OVER-BARE-COPPER (SMOBC)." at -11562,9946.95 h75
  text "3)" at -11762,9796.95 h75
  text "ACCEPTABILITY SHALL BE BASED ON IPC-A-600, CLASS 2." at -11562,9796.95 h75
  text "4)" at -11762,9646.95 h75
  text "THE FOLLOWING GERBER RS274X PHOTO TOOL FILES SHALL BE USED TO DEFINE ALL CIRCUIT FEATURES:" at -11562,9646.95 h75
  text "*.GTL - TOP LAYER GERBER DATA" at -11288,9436 h80
  text "*.G1 - MID LAYER 1 GERBER DATA" at -11288,9282.33 h80
  text "*.GP1 - INTERNAL PLANE LAYER 1 GERBER DATA" at -11288,8821.34 h80
  text "*.GP2 - INTERNAL PLANE LAYER 2 GERBER DATA" at -11288,8667.67 h80
  text "*.GP3- INTERNAL PLANE LAYER 3 GERBER DATA" at -11288,8514 h80
  text "*.GP4 - INTERNAL PLANE LAYER 4 GERBER DATA" at -11288,8360.34 h80
  text "*.GP5- INTERNAL PLANE LAYER 5 GERBER DATA" at -11288,8206.67 h80
  text "*.GBL - BOTTOM LAYER GERBER DATA" at -11288,8053 h80
  text "*.GTO - TOP OVERLAY GERBER DATA" at -11288,7899.34 h80
  text "*.GTS - TOP SOLDER MASK GERBER DATA" at -11288,7745.67 h80
  text "*.GTP - TOP-SIDE SOLDER PASTE MASK" at -11288.01,7592 h80
  text "*GBO - BOTTOM OVERLAY GERBER DATA" at -11288,7438.34 h80
  text "*.GBS - BOTTOM SOLDER MASK GERBER DATA" at -11288,7284.67 h80
  text "*.GBP - BOTTOM-SIDE SOLDER PASTE MASK" at -11288.01,7131 h80
  text "5)" at -11859,6415.23 h75
  text "THE PHOTO TOOL SHALL NOT BE COMPENSATED WITHOUT PRIOR ENGINEERING APPROVAL." at -11659,6415.23 h75
  text "PCB DESIGNER: RICH LOBDILL   PH (805) 880-1621  FAX (805) 961-1792." at -11659,6265.28 h75
  text "FABRICATION TOLERANCES" at -11804,5939 h90
  text "6)" at -11704,5738.95 h75
  text "END PRODUCT CONDUCTOR WIDTHS AND PAD DIAMETERS SHALL NOT VARY MORE THAN" at -11504,5738.95 h75
  text "0.002\" FROM THE 1:1 DIMENSIONS OF THE MASTER ARTWORK." at -11504,5589 h75
  text "7)" at -11704,5438.95 h75
  text "THE CONDUCTIVE PATTERN SHALL BE POSITIONED SO THAT THE LOCATION OF ANY PAD OR" at -11504,5438.95 h75
  text "LAND SHALL BE WITHIN 0.005\" DIAMETER TO THE TRUE POSITION OF THE HOLE IT CIRCUMSCRIBES." at -11504,5289 h75
  text "8)" at -11704,5138.95 h75
  text "ALL DRILL HOLE SIZES AND TOLERANCES APPLY AFTER PLATING." at -11504,5138.95 h75
  text "9)" at -11704,4988.95 h75
  text "THE MINIMUM ANNULAR RING SHALL BE 0.005\"." at -11504,4988.95 h75
  text "10)" at -11759,4838.95 h75
  text "BOW AND TWIST SHALL NOT EXCEED 0.010\" PER INCH." at -11504,4838.95 h75
  text "11)" at -11749,4688.95 h75
  text "FOR PCB ROUTING DIMENSIONS: .XXX = +/-.005\"  .XX = +/-.020\"" at -11504,4688.95 h75
  text "MATERIAL" at -11804,4489 h90
  text "12)" at -11759,4288.95 h75
  text "BASE MATERIAL IS FR4 EPOXY FIBERGLASS" at -11497,4283 h75
  text "SEE STACK-UP LEGEND FOR COPPER CLADDING CALL OUTS" at -11497,4143 h75
  text "13)" at -11759,4138.95 h75
  text "PLATING" at -11804,3939 h90
  text "14)" at -11759,3743.95 h75
  text "ALL HOLES AND CONDUCTIVE SURFACES SHALL BE PLATED WITH A MINIMUM OF 0.001\" COPPER." at -11504,3743.95 h75
  text "15)" at -11759,3593.95 h75
  text "AFTER SOLDERMASK, ALL EXPOSED HOLES AND CONDUCTIVE SURFACES SHALL BE COATED" at -11504,3593.95 h75
  text "WITH A GOLD IMMERSION PLATING TO PRESERVE SOLDERABILITY." at -11497,3443 h75
  text "COPPER THEVING ON LAYERS AS NEEDED" at -11419,3293 h75
  text "15.1)" at -11735.17,3292.23 h75
  text "COATINGS" at -11824,3042 h90
  text "16)" at -11774,2846.95 h75
  text "THE SOLDERMASK SHALL BE BLACK LIQUID PHOTO-IMAGEABLE PER IPC-SM-840, TYPE-B, CLASS 2." at -11524,2846.95 h75
  text "17)" at -11779,2696.95 h75
  text "THE SOLDERMASK REGISTRATION ALLOWANCE IS 0.003\".  THERE SHALL BE NO SOLDERMASK ON" at -11524,2696.95 h75
  text "ANY SOLDER PAD OR LAND." at -11524,2546.95 h75
  text "MARKING" at -11824,2347 h90
  text "18)" at -11779,2151.95 h75
  text "THE LEGEND SHALL BE SCREEN-PRINTED USING PERMANENT YELLOW EPOXY INK." at -11524,2151.95 h75
  text "19)" at -11779,2001.95 h75
  text "THE SCREEN PRINTING REGISTRATION ALLOWANCE IS 0.007\".  THERE SHALL BE NO INK ON ANY" at -11524,2001.95 h75
  text "SOLDER PAD OR LAND." at -11524,1852 h75
  text "20)" at -11789,1701.95 h75
  text "THE VENDOR CODE AND UL FLAMMABILITY RATING MAY BE ETCHED IN THE FOIL OR MARKED IN" at -11524,1701.95 h75
  text "PERMANENT EPOXY INK (VENDOR'S OPTION)." at -11524,1552 h75
  text "ELECTRICAL TESTING" at -11824,1352 h90
  text "21)" at -11779,1156.95 h75
  text "ALL BOARDS SHALL BE ELECTRICALLY TESTED TO THE SUPPLIED IPC-D-356A NET LIST" at -11524,1156.95 h75
  text "FOR CONTINUITY, OPENS AND SHORTS." at -11524,1007 h75
  text "Layer Stack Up Detail for: 175-00024_rev3, Backplane, Instrument Crate.PcbDoc" at -11750,532.25 h72
  text "Layer" at -11750,165.2 h72
  text "COPPER THICKNESS" at -9210,81 h100
  text "Name" at -11750,21.2 h72
  text "1/2 oz,  1 oz Finished" at -9410,-219 h100
  text "Top Layer (*.GTL)" at -11750,-256.5 h101
  text "Mid-Layer 1 (*.G1)" at -11750,-691.5 h101
  text "1/2 oz" at -9410,-719 h100
  text "1/2 oz" at -9459,-1139 h100
  text "+3.3V (*.GP1)" at -11742,-1149.5 h101
  text "2 oz" at -9403,-1571 h100
  text "+24V (*.GP2)" at -11743,-1578.5 h101
  text "2 oz" at -9414,-1903 h100
  text "RTN (*.GP3)" at -11693,-1952 h101
  text "+12V (*.GP4)" at -11750,-2431.5 h101
  text "1/2 oz" at -9467,-2439 h100
  text "Signal GND (*.GP5)" at -11750,-2866.5 h101
  text "1/2 oz" at -9525,-2907 h100
  text "Las Cumbres Observatory, Inc." at 6628,-3254 h90
  text "Bottom Layer (*.GBL)" at -11750,-3301.5 h101
  text "1/2 oz,  1 oz Finished" at -9510,-3319 h100
  text "Las Cumbres Observatory" at 4858,-3374 h150
  text "PRIMARY PCB SPECIFICATIONS" at -4305,-3389 h200
  text "6740 Cortona Dr." at 7068,-3408 h90
  text "Global Telescope Network" at 5018,-3534 h125
  text "Goleta, CA 93117" at 7018,-3558 h90
  text "(REFER TO COMPLETE SPEC LISTING AT LEFT FOR FURTHER DETAILS)" at -4652,-3594 h100
  text "www.lcogt.net" at 7158,-3704 h90
  text "DATE" at 4683,-3814.8 h32
  text "DESIGNED" at 5623,-3814.8 h32
  text "DRAWN" at 6703,-3814.8 h32
  text "SCALE" at 7783,-3814.8 h32
  text "NUMBER OF LAYERS" at -4552,-3844 h150
  text "8" at -1002,-3844.02 h150
  text "Rich Lobdill" at 7008,-3914 h55
  text "Rich Lobdill" at 5883,-3919 h55
  text "1 : 1" at 8068,-3933 h90
  text "4/5/2012" at 4713,-3940 h90
  text "FINISHED THICKNESS" at -4552,-4094 h150
  text ".062\"" at -1177,-4094 h150
  text "CHECKED/DATE" at 4683,-4104.8 h32
  text "APPROVED/DATE" at 6703,-4104.8 h32
  text "BASE MATERIAL" at -4552,-4344 h150
  text "FR4" at -1252,-4344 h150
  text "TITLE" at 4683,-4394.8 h32
  text "175-00024, BACKPLANE, INSTRUMENT CRATE" at 4903,-4539 h100
  text "GOLD IMMERSION" at -1746,-4561 h150
  text "PLATING TYPE" at -4552,-4594 h150
  text "THIS DRAWING EMBODIES A PROPRIETARY DESIGN OWNED BY LAS CUMBRES" at -12172,-4618 h60
  text "OBSERVATORY.  IT IS SUBMITTED FOR A SPECIFIC PURPOSE UNDER A CON-" at -12172,-4718 h60
  text "SIZE" at 4683,-4724.8 h32
  text "DOC NO." at 5143,-4724.8 h32
  text "REV" at 7223,-4724.8 h32
  text "SHEET" at 7683,-4724.8 h32
  text "FIDENTIAL RELATIONSHIP, AND EXCEPT FOR PURPOSES EXPRESSLY GRANTED" at -12172,-4813 h60
  text "OF" at 8113,-4828 h60
  text "SOLDER MASK COLOR" at -4552,-4844 h150
  text "BLACK" at -1127,-4844 h150
  text "1" at 7943,-4848 h100
  text "X" at 8343,-4848 h100
  text "3" at 7368,-4861 h130
  text "-" at 5698,-4863 h130
  text "GPT" at 6417.72,-4877.8 h130
  text "C" at 4818,-4879 h100
  text "IN WRITING, ALL RIGHTS ARE RESERVED BY LAS CUMBRES OBSERVATORY." at -12172,-4903 h60
Mechanical 5:
  text "175-00024  REV 3" at 2796.03,-640.42 h80
  text "LAS CUMBRES OBSERVATORY     4/5/2012" at 2796.03,-790.43 h80
Drill Drawing:
  lines w10: -12282,-4979 -12282,11021 8718,11021 8718,-4979 -12282,-4979 ; 4663,-4873 ccw(c4713,-4873) 4713,-4923 5043,-4923 ccw(c5043,-4883) 5083,-4883 5083,-4713 ccw(c5043,-4713) 5043,-4673 4663,-4673 4663,-4873 ; 4663,-4583 ccw(c4713,-4583) 4713,-4633 8613,-4633 ccw(c8613,-4583) 8663,-4583 8663,-4393 ccw(c8613,-4393) 8613,-4343 4663,-4343 4663,-4583 ; 4663,-4263 ccw(c4703,-4263) 4703,-4303 6123,-4303 ccw(c6123,-4253) 6173,-4253 6173,-4103 ccw(c6123,-4103) 6123,-4053 4663,-4053 4663,-4263 ; 5123,-4883 ccw(c5163,-4883) 5163,-4923 7123,-4923 ccw(c7123,-4883) 7163,-4883 7163,-4713 ccw(c7123,-4713) 7123,-4673 5123,-4673 5123,-4883 ; 6213,-4253 ccw(c6263,-4253) 6263,-4303 7673,-4303 ccw(c7673,-4253) 7723,-4253 7723,-4103 ccw(c7673,-4103) 7673,-4053 6213,-4053 6213,-4253 ; 7203,-4873 ccw(c7253,-4873) 7253,-4923 7583,-4923 ccw(c7583,-4883) 7623,-4883 7623,-4713 ccw(c7583,-4713) 7583,-4673 7203,-4673 7203,-4873 ; 7663,-4883 ccw(c7703,-4883) 7703,-4923 8613,-4923 ccw(c8613,-4873) 8663,-4873 8663,-4723 ccw(c8613,-4723) 8613,-4673 7663,-4673 7663,-4883 ; 7763,-4253 ccw(c7813,-4253) 7813,-4303 8613,-4303 ccw(c8613,-4253) 8663,-4253 8663,-4103 ccw(c8613,-4103) 8613,-4053 7763,-4053 7763,-4253
  lines w20: -12256.94,-4348.12 cw(c-12207,-4423) -12207,-4333 ; -12207,-4373 ccw(c-12207,-4423) -12257,-4423 -12257,-4913 ccw(c-12207,-4913) -12207,-4963 -9007,-4963 ccw(c-9007,-4913) -8957,-4913 -8957,-4573 ccw(c-9007,-4573) -9007,-4523 ; -8932.12,-4962.94 ccw(c-9007,-4913) -8917,-4913 -8917,-4573 ; 4617.92,-4961.66 cw(c4713,-4873) 4583,-4873 4583,-4053 cw(c4663,-4053) 4663,-3973 8613,-3973 cw(c8613,-4103) 8701.66,-4007.92 ; 4623,-4873 ccw(c4713,-4873) 4713,-4963 8613,-4963 ccw(c8613,-4873) 8703,-4873 8703,-4103 ccw(c8613,-4103) 8613,-4013 4663,-4013 ccw(c4663,-4053) 4623,-4053 4623,-4873
  lines w30: -12782,-5479 -12782,11521 9218,11521 9218,-5479 -12782,-5479
  text ".Legend" at -5924,538 h100
  text "DESIGNED" at 4683,-4104.8 h32
  text "DRAWN" at 6233,-4104.8 h32
  text "SCALE" at 7783,-4104.8 h32
  text "Rich Lobdill" at 5169,-4201 h55
  text "Rich Lobdill" at 6730,-4203 h55
  text "1 : 1" at 8068,-4223 h90
  text "TITLE" at 4683,-4394.8 h32
  text "175-00024, BACKPLANE, INSTRUMENT CRATE" at 4900,-4539 h100
  text "THIS DRAWING EMBODIES A PROPRIETARY DESIGN OWNED BY LAS CUMBRES" at -12167,-4633 h60
  text "SIZE" at 4683,-4724.8 h32
  text "DOC NO." at 5143,-4724.8 h32
  text "REV" at 7223,-4724.8 h32
  text "SHEET" at 7683,-4724.8 h32
  text "OBSERVATORY.  IT IS SUBMITTED FOR A SPECIFIC PURPOSE UNDER A CON-" at -12167,-4733 h60
  text "FIDENTIAL RELATIONSHIP, AND EXCEPT FOR PURPOSES EXPRESSLY GRANTED" at -12167,-4828 h60
  text "OF" at 8113,-4828 h60
  text "2" at 7928,-4848 h100
  text "X" at 8343,-4848 h100
  text "-" at 5698,-4863 h130
  text "3" at 7363,-4863 h130
  text "C" at 4818,-4879 h120
  text "GD1" at 6518,-4879 h120
  text "IN WRITING, ALL RIGHTS ARE RESERVED BY LAS CUMBRES OBSERVATORY." at -12167,-4918 h60

## Dimensions
0,0 to 0,10183.07 on Mechanical 2
0,0 to 8400,0 on Mechanical 2
310,6147.6 to -1310,6981 on Mechanical 2
-8855,-1656 to -5810,-119 on Mechanical 2

## Text inside footprints (layer, text, board x,y; h text height)
J1A: Top Overlay "16" at 1055.51,8267.32 h40; Top Overlay "1" at 485.51,7597.32 h40; Top Overlay "13" at 1060.51,7137.32 h40; Top Overlay "4" at 1060.51,7597.32 h40; Top Overlay "12" at 1055.51,7802.32 h40; Top Overlay "14" at 1060.51,7372.32 h40; Top Overlay "15" at 1055.51,8027.32 h40
J1B: Top Overlay "16" at 2455.51,8267.32 h40; Top Overlay "1" at 1885.51,7597.32 h40; Top Overlay "13" at 2460.51,7137.32 h40; Top Overlay "4" at 2460.51,7597.32 h40; Top Overlay "12" at 2455.51,7802.32 h40; Top Overlay "14" at 2460.51,7372.32 h40; Top Overlay "15" at 2455.51,8027.32 h40
J1C: Top Overlay "16" at 3855.51,8267.32 h40; Top Overlay "1" at 3285.51,7597.32 h40; Top Overlay "13" at 3860.51,7137.32 h40; Top Overlay "4" at 3860.51,7597.32 h40; Top Overlay "12" at 3855.51,7802.32 h40; Top Overlay "14" at 3860.51,7372.32 h40; Top Overlay "15" at 3855.51,8027.32 h40
J1D: Top Overlay "16" at 5255.51,8267.32 h40; Top Overlay "1" at 4685.51,7597.32 h40; Top Overlay "13" at 5260.51,7137.32 h40; Top Overlay "4" at 5260.51,7597.32 h40; Top Overlay "12" at 5255.51,7802.32 h40; Top Overlay "14" at 5260.51,7372.32 h40; Top Overlay "15" at 5255.51,8027.32 h40
J1E: Top Overlay "16" at 6655.51,8267.32 h40; Top Overlay "1" at 6085.51,7597.32 h40; Top Overlay "13" at 6660.51,7137.32 h40; Top Overlay "4" at 6660.51,7597.32 h40; Top Overlay "12" at 6655.51,7802.32 h40; Top Overlay "14" at 6660.51,7372.32 h40; Top Overlay "15" at 6655.51,8027.32 h40
J1F: Top Overlay "16" at 8055.51,8267.32 h40; Top Overlay "1" at 7485.51,7597.32 h40; Top Overlay "13" at 8060.51,7137.32 h40; Top Overlay "4" at 8060.51,7597.32 h40; Top Overlay "12" at 8055.51,7802.32 h40; Top Overlay "14" at 8060.51,7372.32 h40; Top Overlay "15" at 8055.51,8027.32 h40
J1G: Top Overlay "16" at 1055.5,3016.14 h40; Top Overlay "1" at 485.5,2346.14 h40; Top Overlay "13" at 1060.5,1886.14 h40; Top Overlay "4" at 1060.5,2346.14 h40; Top Overlay "12" at 1055.5,2551.14 h40; Top Overlay "14" at 1060.5,2121.14 h40; Top Overlay "15" at 1055.5,2776.14 h40
J1H: Top Overlay "16" at 2455.5,3016.14 h40; Top Overlay "1" at 1885.5,2346.14 h40; Top Overlay "13" at 2460.5,1886.14 h40; Top Overlay "4" at 2460.5,2346.14 h40; Top Overlay "12" at 2455.5,2551.14 h40; Top Overlay "14" at 2460.5,2121.14 h40; Top Overlay "15" at 2455.5,2776.14 h40
J1I: Top Overlay "16" at 3855.5,3016.14 h40; Top Overlay "1" at 3285.5,2346.14 h40; Top Overlay "13" at 3860.5,1886.14 h40; Top Overlay "4" at 3860.5,2346.14 h40; Top Overlay "12" at 3855.5,2551.14 h40; Top Overlay "14" at 3860.5,2121.14 h40; Top Overlay "15" at 3855.5,2776.14 h40
J1J: Top Overlay "16" at 5255.5,3016.14 h40; Top Overlay "1" at 4685.5,2346.14 h40; Top Overlay "13" at 5260.5,1886.14 h40; Top Overlay "4" at 5260.5,2346.14 h40; Top Overlay "12" at 5255.5,2551.14 h40; Top Overlay "14" at 5260.5,2121.14 h40; Top Overlay "15" at 5255.5,2776.14 h40
J1K: Top Overlay "16" at 6655.5,3016.14 h40; Top Overlay "1" at 6085.5,2346.14 h40; Top Overlay "13" at 6660.5,1886.14 h40; Top Overlay "4" at 6660.5,2346.14 h40; Top Overlay "12" at 6655.5,2551.14 h40; Top Overlay "14" at 6660.5,2121.14 h40; Top Overlay "15" at 6655.5,2776.14 h40
J1L: Top Overlay "16" at 8055.5,3016.14 h40; Top Overlay "1" at 7485.5,2346.14 h40; Top Overlay "13" at 8060.5,1886.14 h40; Top Overlay "4" at 8060.5,2346.14 h40; Top Overlay "12" at 8055.5,2551.14 h40; Top Overlay "14" at 8060.5,2121.14 h40
J2: Bottom Overlay "13" at 2315,8876.08 h50 r90; Bottom Overlay "14" at 2215,8876.08 h50 r90; Bottom Overlay "1" at 2315,9676.08 h50 r90; Bottom Overlay "2" at 2215,9676.08 h50 r90
P2: Bottom Overlay "1" at 8068,9196.08 h40
U5: Bottom Overlay "A1" at 3109,4996 h50; Bottom Overlay "B1" at 3859,4986 h50